# Altium PCB PCB1.PcbDoc
Units mm, origin at the board's own origin, x right, y up, seen from the top; angles counter-clockwise.
Board outline 22 x 22 mm, 2 copper layers (Top Layer, Bottom Layer); 6 components, 8 nets, 25 pads, 0 vias.
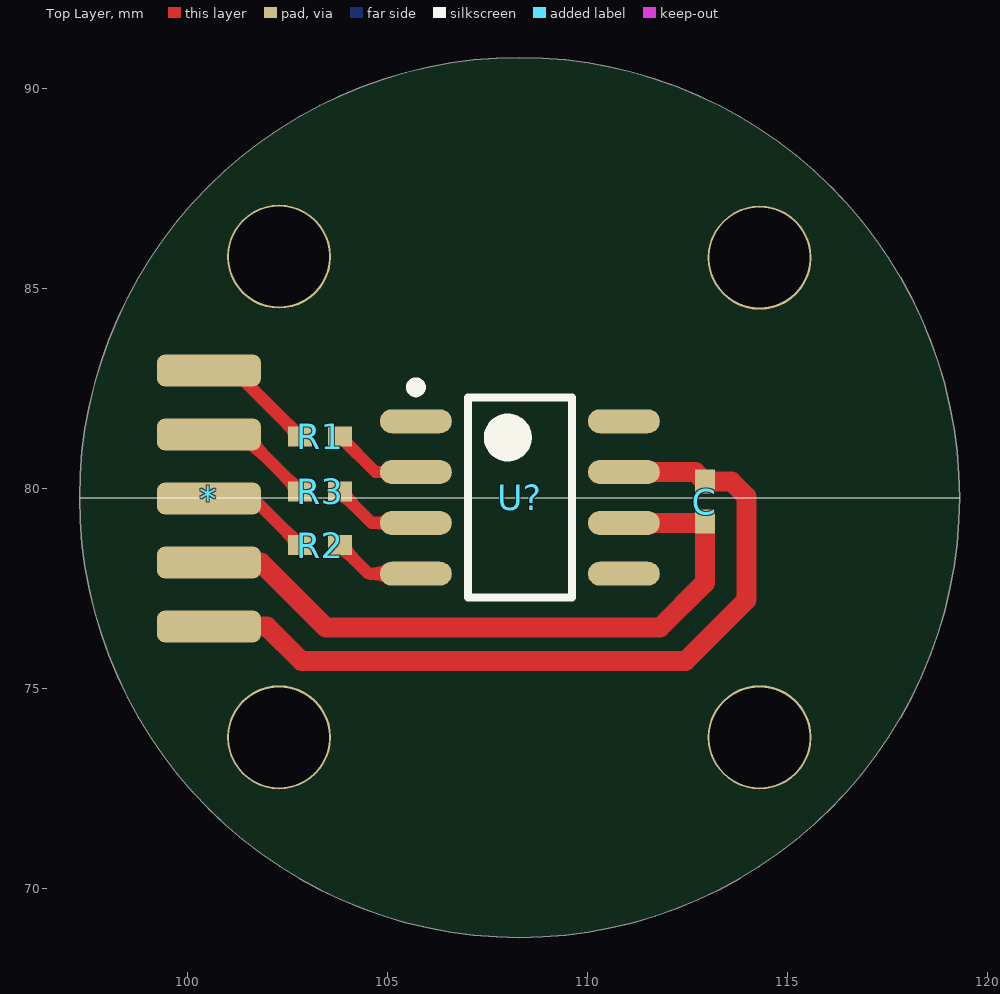
[diagram p0: Top Layer view]
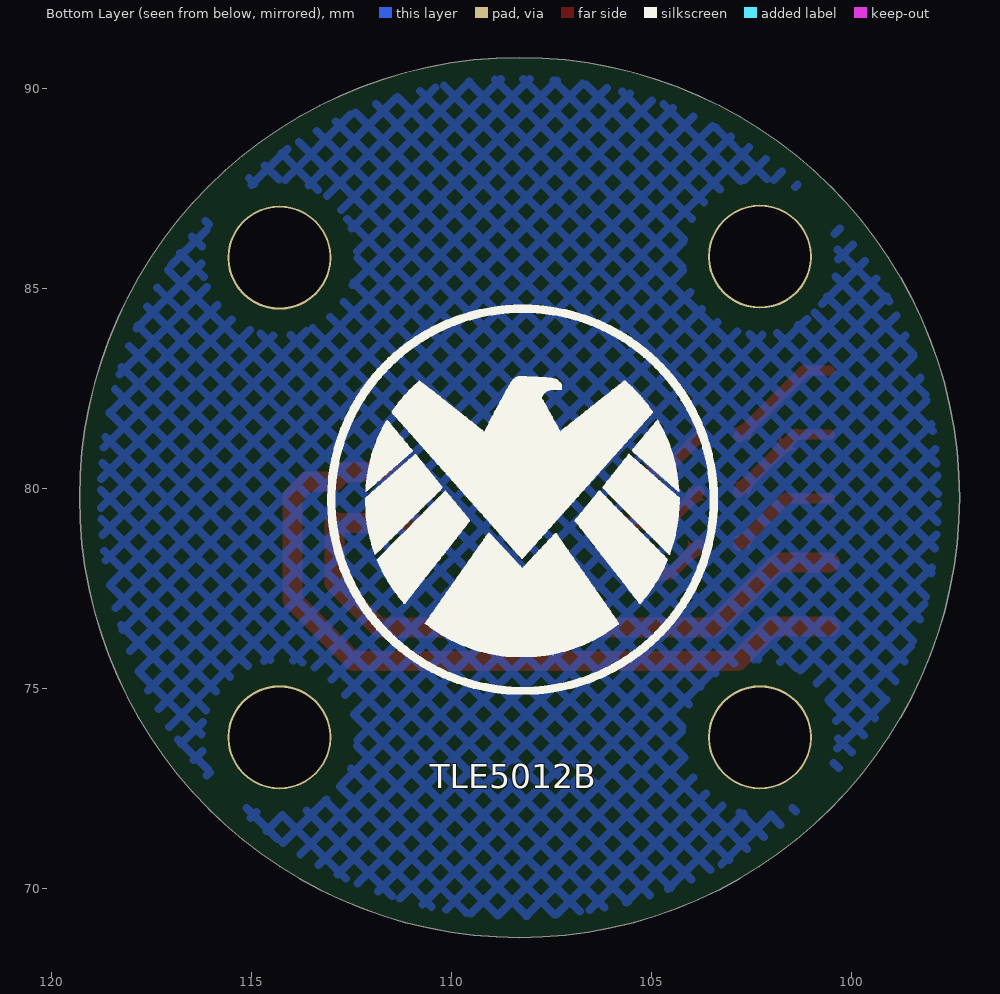
[diagram p1: Bottom Layer view, seen from below]

## Layer stack, top to bottom
Top Solder: solder mask 0.0102, Solder Resist, Dk 3.5
Top Layer: signal copper 0.0356
Dielectric 1: dielectric 0.32, FR-4, Dk 4.8
Bottom Layer: signal copper 0.0356
Bottom Solder: solder mask 0.0102, Solder Resist, Dk 3.5

## Board outline
97.297,79.78 ccw(c108.297,79.78) 108.297,68.78 ccw(c108.297,79.78) 119.297,79.78 ccw(c108.297,79.78) 108.297,90.78 ccw(c108.297,79.78)

## Design rules (kind name [scope] priority, off if disabled: settings)
BoardOutlineClearance [All] p1: gap=0.4 ignorepadtopadclearanceinfootprint=FALSE
Clearance Clearance_1 [InNamedPolygon('Top Layer-No Net')] p1: gap=0.1 ignorepadtopadclearanceinfootprint=FALSE except(0.6: Poly-Hole)
Clearance [All] p2: gap=0.254 ignorepadtopadclearanceinfootprint=FALSE
PolygonConnect [All] p1: connectstyle=Relief reliefconductorwidth=0.254 reliefentries=4 polygonreliefangle="90 Angle" airgapwidth=0.254
RoutingVias [All] p1: holewidth=0.711 width=1.27 viastyle="Through Hole" minholewidth=0.711 minwidth=1.27 maxholewidth=0.711 maxwidth=1.27
SolderMaskExpansion [All] p1: expansion=0.102
Width [All] p1: maxlimit=2 minlimit=0.254 preferedwidth=0.254
30 further rules are at their usual default settings.

## Components (designator, comment, footprint, x,y, rotation, side; value= is the part's Value field where it differs from the comment)
* "5Pin" 5Pin 100.533,79.756 r90 top
C "104" 0402 112.928,79.68 r270 top
R1 "100R" 0402 103.31,81.305 r0 top
R2 "470R" 0402 103.31,78.588 r0 top
R3 "100R" 0402 103.31,79.934 r0 top
U? "TLE5012B E1000" INF-PG-DSO-8-16_N 108.306,79.781 r0 top

## Footprints (in the part's own frame and the unit in brackets; to place one, negate y for a bottom-side part, rotate by r counter-clockwise, add the part's x,y. Pads: shape width x height; smd on the part's side, far side on the other; paste and mask are expansions set on the pad)
5Pin [mm]
  rrect50% 0.8x2.6 smd: 1(-3.2,0) 2(-1.6,0) 3(0,0) 4(1.6,0) 5(3.2,0)
0402 [mm] "Chip Capacitor, Body 1.0x0.5mm, IPC High Density"
  rect 0.6x0.5 smd: 1(-0.5,0) 2(0.5,0)
  body extent -0.55,-0.3 0.55,0.3, height 1.3
INF-PG-DSO-8-16_N [mm] "SOP, 8-Leads, Body 4.9x3.9mm, Pitch 1.27mm, IPC Medium Density"
  oval 1.8x0.6 smd: 1(-2.6,1.905) 2(-2.6,0.635) 3(-2.6,-0.635) 4(-2.6,-1.905) 5(2.6,-1.905) 6(2.6,-0.635) 7(2.6,0.635) 8(2.6,1.905)
  silkscreen extent -2.72,-2.5 1.3,2.88, body extent -2,-2.5 2,2.5, height 1.75

## Part data
C: library part C
R1 R2 R3: library part R
U?: "GMR-Based Angle Sensor, PG-DSO-8-16, Reel, Green", Manufacturer=Infineon, Supplier Part Number 1=726-TLE5012BE1000, ComponentLink1Description="Manufacturer URL", ComponentLink1URL=http://www.infineon.com/, ComponentLink2Description=Datasheet, ComponentLink2URL=http://www.infineon.com/dgdl/TLE5012B_FDS_Rev1+1.pdf?folderId=db3a30431ce5fb52011d3dd6e8012582&fileId=db3a304334fac4c601350f31c43c433f, ComponentLink3Description="Package Specification", ComponentLink3URL=http://www.infineon.com/dgdl/TLE7259-2GE_DS_rev12.pdf?folderId=db3a3043163797a6011666d32a0c0de1&fileId=db3a3043163797a6011666d4dbb80de2&location=en.Products.Automotive_ICs.Automotive_Transceivers.LIN_Transceivers.DATASHEET.TLE7259-2GE_DS_rev12.pdf, DatasheetVersion="Rev. 1.1", Green=TRUE, Halogen-free=available, Interface="SPI, IIF", Mounting Technology="Surface Mount", PackageDescription="8-Pin Plastic (Green) Dual Small Outline Package, 4.9 x 3.9 mm Body, 1.27 mm Pitch", PackageReference=PG-DSO-8-16, PackageVersion=Mar-07, Packing=Reel, PartNumber="TLE5012B E1000", Supplier 1=Mouser

## Free pads (board coordinates)
  round 2.6 hole 2.5: 1(114.3,85.776) 2(114.3,73.787) 3(102.286,73.787) 4(102.286,85.801)

## Nets (pads, with @x,y where several pads share a name; then routed paths per layer and width w, separated by ;. In a path a pad name is that pad's centre, name@x,y a point inside that pad or via, vN(x,y) a via of type N, cw(c..) or ccw(c..) an arc to the next point about the centre after c; other vN are vias at no path point)
GND: *.1 C.1 U?.7 | length 20.3
  Top Layer w0.5: *.1 101.981,76.556 102.845,75.692 112.446,75.692 113.97,77.216 113.97,79.807 113.597,80.18 C.1 112.692,80.416 U?.7
Net*_2: *.2 C.2 U?.6 | length 17.1
  Top Layer w0.5: *.2 101.829,78.156 103.454,76.53 111.811,76.53 112.928,77.648 C.2 112.895,79.146 U?.6
Net*_3: *.3 R2.1 | length 2.8
  Top Layer w0.254: *.3 *.3@101.642,79.756
  Top Layer w0.3: *.3@101.642,79.756 R2.1
Net*_4: *.4 R3.1 | length 2.9
  Top Layer w0.254: *.4 *.4@101.388,81.356
  Top Layer w0.3: *.4@101.388,81.356 R3.1
Net*_5: *.5 R1.1 | length 3
  Top Layer w0.254: *.5 *.5@101.159,82.956
  Top Layer w0.3: *.5@101.159,82.956 R1.1
NetR1_2: R1.2 U?.2 | length 2.3
  Top Layer w0.3: R1.2 104.699,80.416 U?.2
NetR2_2: R2.2 U?.4 | length 2.2
  Top Layer w0.3: R2.2 104.521,77.876 U?.4
NetR3_2: R3.2 U?.3 | length 2.2
  Top Layer w0.3: R3.2 104.597,79.146 U?.3
pads on no net: U?.1 U?.5 U?.8

## Polygon pours and split planes (outlines as drawn)
no net on Bottom Layer "Top Layer-No Net" (hatched 45Degree grid 0.508 track 0.203, remove dead copper, pour order 25): 97.297,79.78 ccw(c108.297,79.78) 108.297,68.78 ccw(c108.297,79.78) 119.297,79.78 ccw(c108.297,79.78) 108.297,90.78 ccw(c108.297,79.78)

## Silkscreen, mask and mechanical layers (free items; w line width, h text height)
Top Overlay:
  lines w0: 97.297,79.78 119.297,79.78
Bottom Overlay:
  drawing of 3891 lines, arcs and shapes, not listed
  text "TLE5012B" at 110.541,72.517 h0.6
Mechanical 1:
  circle w0.1: c108.297,79.78 r11